# EAGLE board PCB v23 (EAGLE 9.7.0)
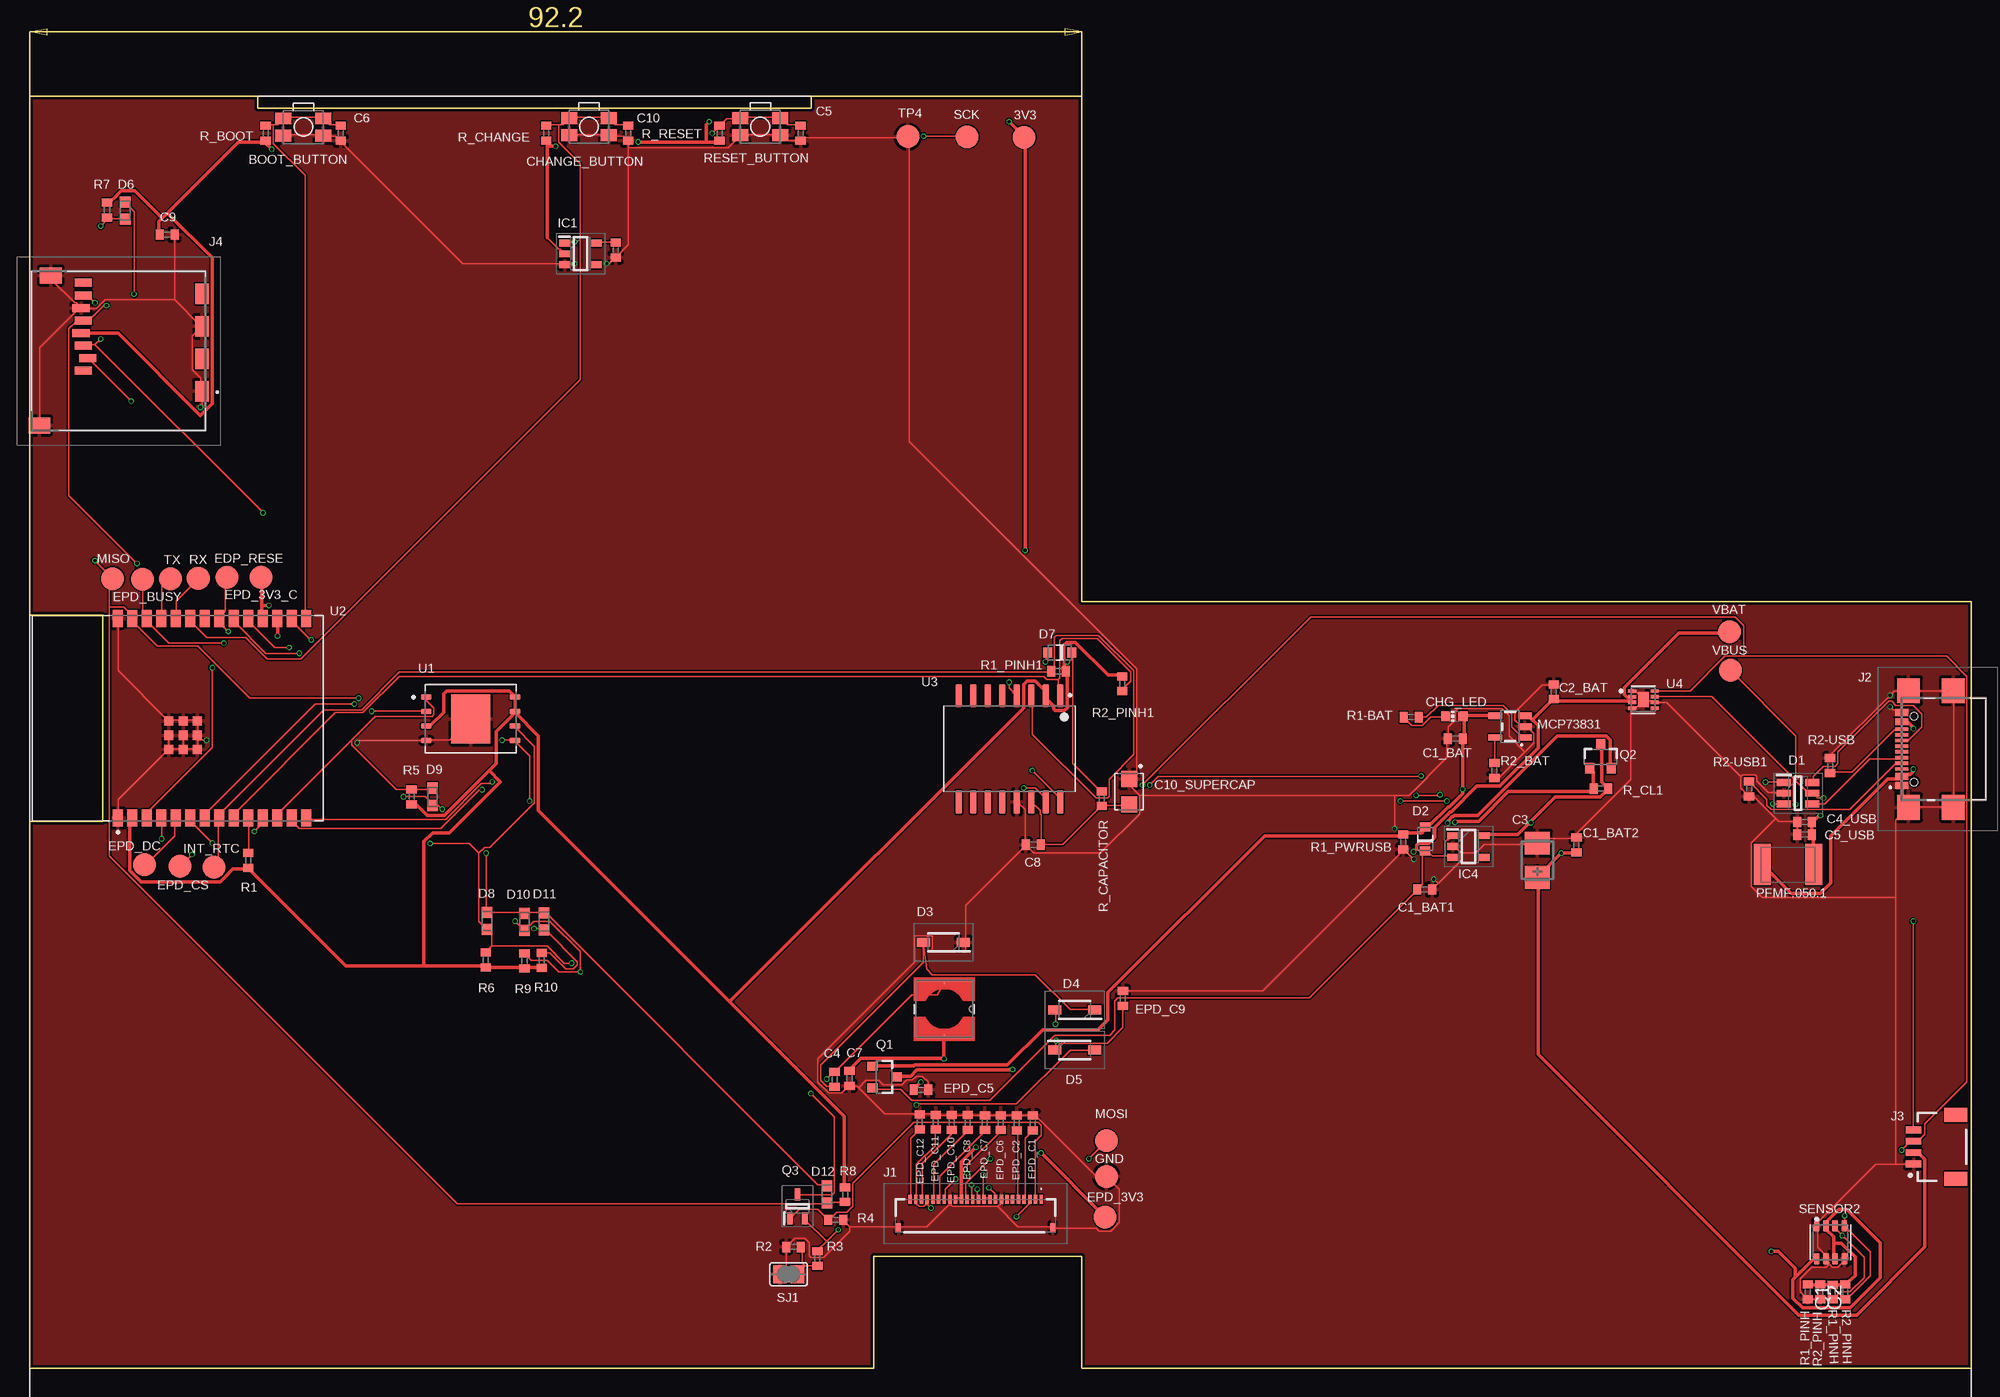
[diagram p0: board, top side]
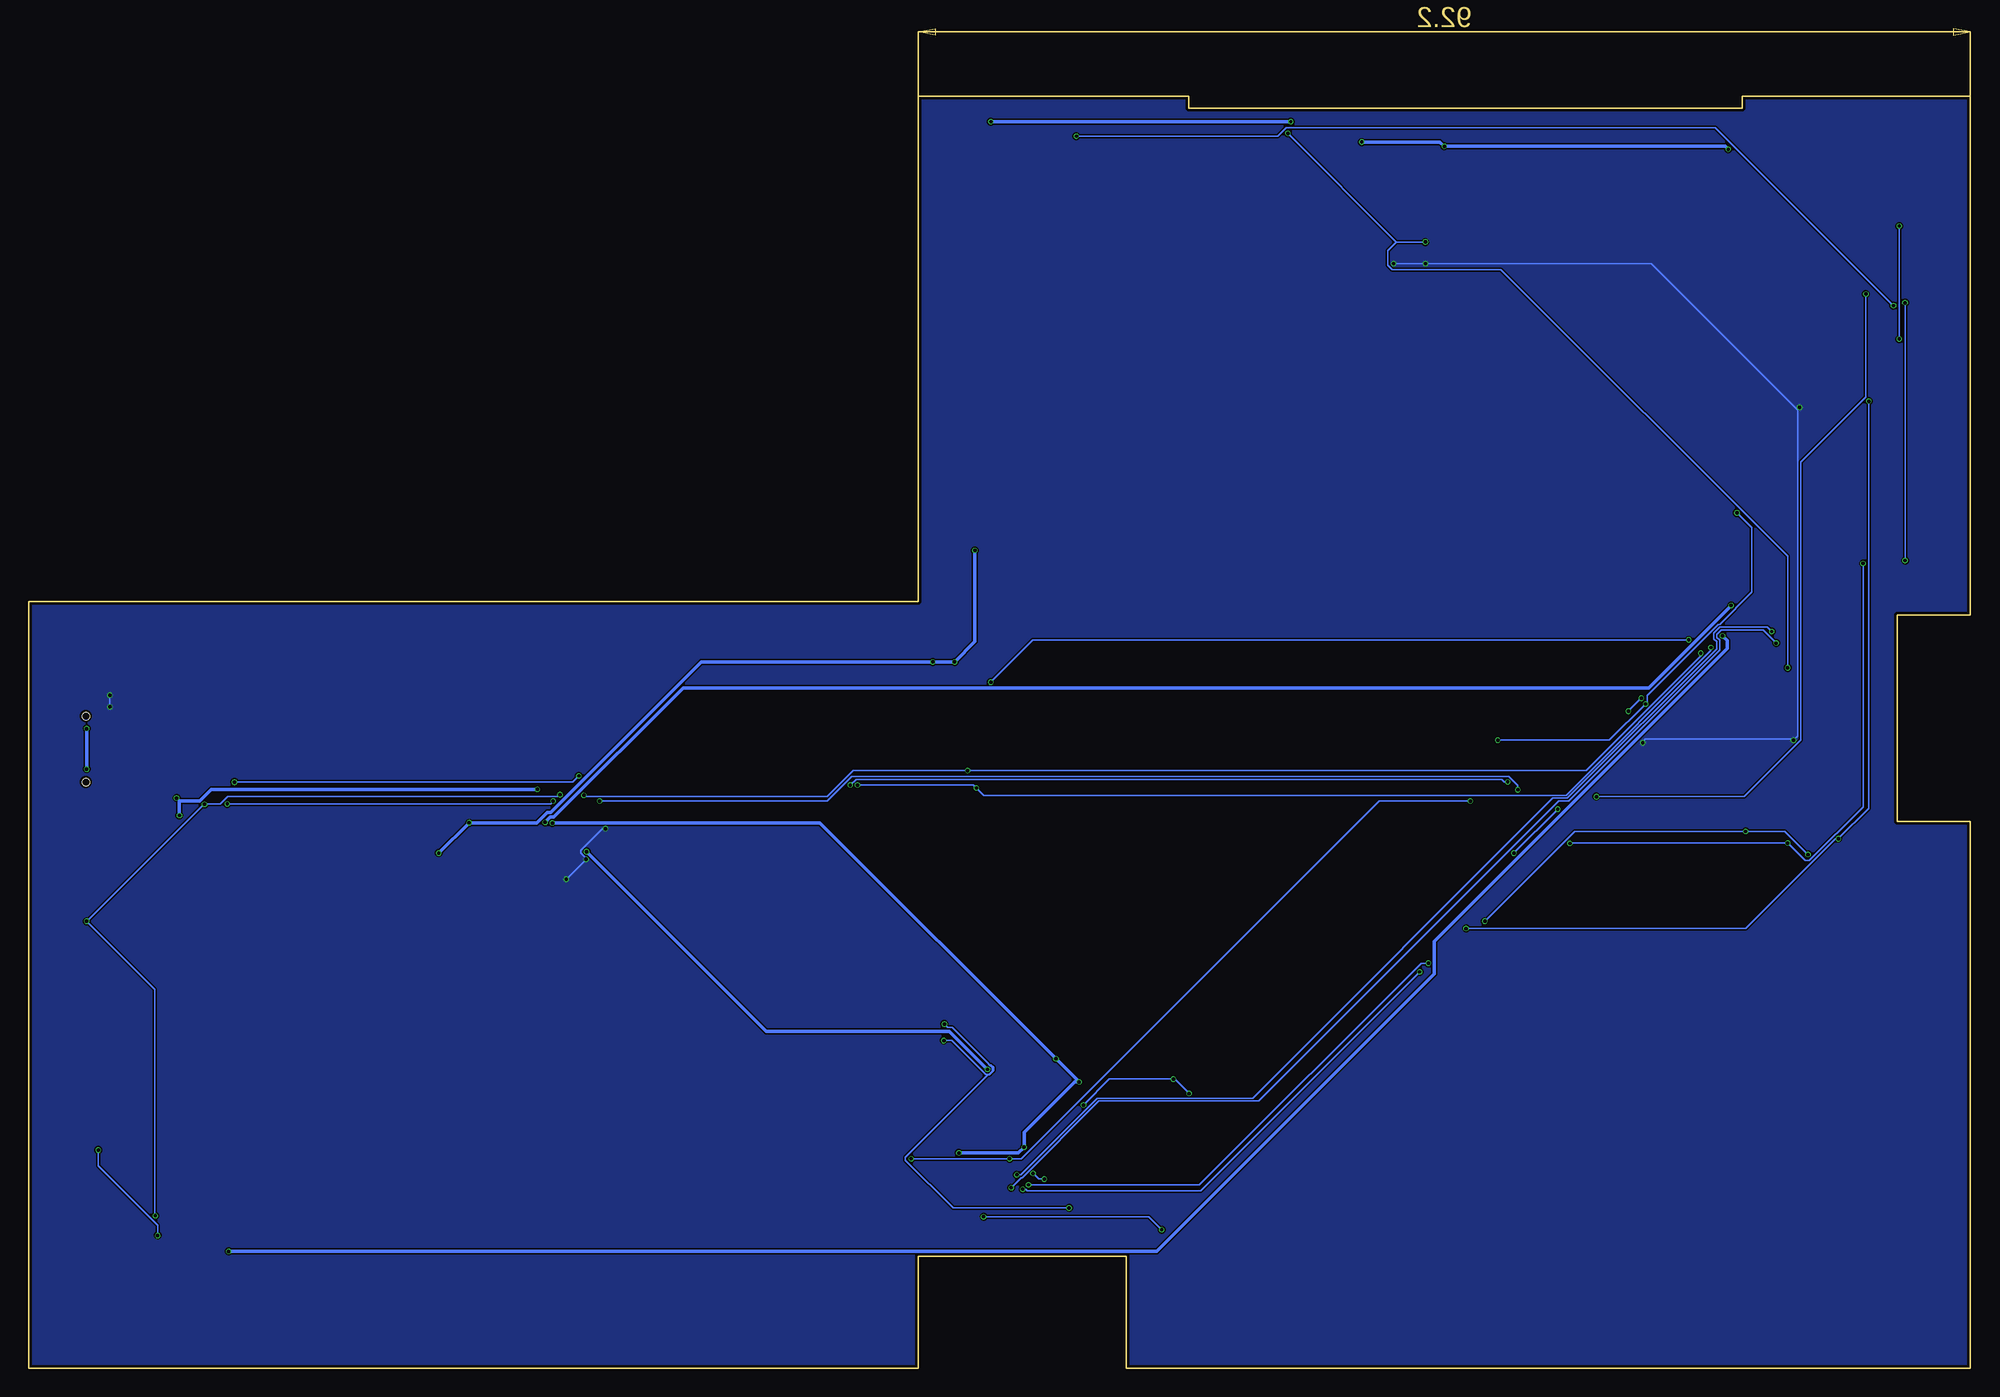
[diagram p1: board, bottom side, seen from below]

Size 170.2 x 111.52 mm. Coordinates in mm from the lower left corner, seen from the top.
Outline: 0,111.52 20,111.52 20,110.46 68.5,110.46 68.5,111.52 92.2,111.52 92.2,67.2 170.2,67.2 170.2,0 92.2,0 92.2,9.82 74,9.82 74,0 0,0 0,47.92 6.4,47.92 6.4,66.02 0,66.02 0,111.52
Copper layers (1*16): Top 0.035mm / dielectric 1.6mm / Bottom 0.035mm
Design rules "jlcpcb-2layers.dru *": minimum track width 5mil, minimum drill 0.3mm, track to track 5mil, track to pad 5mil, pad to pad 5mil, via to via 5mil, smd to smd 5mil, copper to edge 0.2mm, drill to drill 6mil, minimum pad ring 10mil, minimum via ring 3mil, stop-mask expansion 4mil, vias tented up to drill 0mil, thermal gap 10mil

## Footprints (pad centres in the part's own frame; a part is rotated, then mirrored left to right if it is on the bottom)
TP20R = smd 2 x 2: TP 0,0
MYBUTTON = smd 1.4 x 1.05: 1 1.75,0.75; 2 -1.75,0.75; 3 -1.75,-0.75; 4 1.75,-0.75
ESP32_WROVER_EAGLE-LTSPICE_C0402 = smd 0.7 x 0.9: 1 -0.65,0; 2 0.65,0
RCL_CT3528 = smd 2 x 2.2: + -1.5,0; - 1.5,0
CAPCP3225X100N = smd 1.4 x 1.4: 1 -1.1,0; 2 1.1,0
ADAFRUIT_CHIP-LED0603 = smd 0.8 x 0.8: A 0,-0.75; C 0,0.75
SOT95P280X145-6N = smd 1.2 x 0.6: 1 -1.25,0.95; 2 -1.25,0; 3 -1.25,-0.95; 4 1.25,-0.95; 5 1.25,0; 6 1.25,0.95
ESP32_WROVER_AVX---SD0805S020S1R0_AVX_SD0805S020S1R0_0 = smd 0.8 x 0.9: 1 -1.05,0; 2 1.05,0
SOD3716X135N = smd 1.15 x 0.8: 1 -1.75,0; 2 1.75,0
DIOC1608X36N = smd 0.97 x 0.94: 1 -0.75,0; 2 0.75,0
SOT95P280X120-5N = smd 0.9 x 0.6: 1 -1.4,0.95; 2 -1.4,0; 3 -1.4,-0.95; 4 1.4,-0.95; 5 1.4,0.95
FH34SRJ24S05SH99 = smd 0.3 x 0.8: 1 5.75,1.45; 2 5.25,1.45; 3 4.75,1.45; 4 4.25,1.45; 5 3.75,1.45; 6 3.25,1.45; 7 2.75,1.45; 8 2.25,1.45; 9 1.75,1.45; 10 1.25,1.45; 11 0.75,1.45; 12 0.25,1.45; 13 -0.25,1.45; 14 -0.75,1.45; 15 -1.25,1.45; 16 -1.75,1.45; 17 -2.25,1.45; 18 -2.75,1.45; 19 -3.25,1.45; 20 -3.75,1.45; 21 -4.25,1.45; 22 -4.75,1.45; 23 -5.25,1.45; 24 -5.75,1.45 | smd 0.4 x 0.8: MP1 6.75,-1.05; MP2 -6.75,-1.05
SAMACSYS_PARTS_USB4110GFA = smd 0.3 x 1.15: A1 -3.35,3.678; A4 -2.55,3.678; A5 -1.25,3.678; A6 -0.25,3.678; A7 0.25,3.678; A8 1.25,3.678; A9 2.55,3.678; A12 3.35,3.678; B1 3.05,3.678; B4 2.25,3.678; B5 1.75,3.678; B6 0.75,3.678; B7 -0.75,3.678; B8 -1.75,3.678; B9 -2.25,3.678; B12 -3.05,3.678 | smd 2.18 x 2: MP1 -5.11,-0.827; MP2 5.11,-0.827; MP3 -5.11,3.103; MP4 5.11,3.103 | hole 0.65: -2.89,2.603; 2.89,2.603
JST04_1MM_RA = smd 0.6 x 1.35: 1 -1.5,0; 2 -0.5,0; 3 0.5,0; 4 1.5,0 | smd 1.2 x 2: NC1 2.8,-3.675; NC2 -2.8,-3.675
112ATAARR03ATTEND = smd 1.8 x 1.2: G1 10.6,10.4; G2 4.9,10.4; S1 7.75,10.4; S2 2.05,10.4 | smd 1.4 x 1.9: G3 13.6,-3.85; G4 0.45,-2.85 | smd 0.7 x 1.5: P1 8.8,0; P2 7.7,0.4; P3 6.6,0; P4 5.5,-0.2; P5 4.4,0; P6 3.3,-0.2; P7 2.2,0; P8 1.1,0
IND_4828-WE-TPC_WRE = smd 0.127 x 0.127: 1 -2.286,0; 2 2.286,0
ESP32_WROVER_SPARKFUN-IC-POWER_SOT23-5 = smd 0.55 x 1.2: 1 -0.95,-1.3; 2 0,-1.3; 3 0.95,-1.3; 4 0.95,1.3; 5 -0.95,1.3
ESP32C6_VARISTOR_CT/CN1812 = smd 1.5 x 3.6: 1 -2.25,0; 2 2.25,0
ESP32_WROVER_SPARKFUN-DISCRETESEMI_SOT23-3 = smd 0.8 x 0.9: 1 -0.95,-1; 2 0.95,-1; 3 0,1.1
SOT65P210X110-3N = smd 1.05 x 0.5: 1 -1.05,0.65; 2 -1.05,-0.65; 3 1.05,0
ESP32_WROVER_EAGLE-LTSPICE_R0402 = smd 0.7 x 0.9: 1 -0.65,0; 2 0.65,0
ESP32_WROVER_BME680_PSON80P300X300X100-8N = smd 1.016 x 0.5: 1 1.458,1.2; 2 1.458,0.4; 3 1.458,-0.4; 4 1.458,-1.2; 5 -1.458,-1.22; 6 -1.458,-0.4; 7 -1.458,0.4; 8 -1.458,1.2
SJ = smd 1.168 x 1.6: 1 -0.762,0; 2 0.762,0
SON127P600X800X80-9N = smd 0.94 x 0.44: 1 -3.895,1.905; 2 -3.895,0.635; 3 -3.895,-0.635; 4 -3.895,-1.905; 5 3.895,-1.905; 6 3.895,-0.635; 7 3.895,0.635; 8 3.895,1.905 | smd 3.4 x 4.3: 9 0,0
XCVR_ESP32-C6-WROOM-1-N8 = smd 1.5 x 0.9: 1 -8.75,5.26; 2 -8.75,3.99; 3 -8.75,2.72; 4 -8.75,1.45; 5 -8.75,0.18; 6 -8.75,-1.09; 7 -8.75,-2.36; 8 -8.75,-3.63; 9 -8.75,-4.9; 10 -8.75,-6.17; 11 -8.75,-7.44; 12 -8.75,-8.71; 13 -8.75,-9.98; 14 -8.75,-11.25; 15 8.75,-11.25; 16 8.75,-9.98; 17 8.75,-8.71; 18 8.75,-7.44; 19 8.75,-6.17; 20 8.75,-4.9; 21 8.75,-3.63; 22 8.75,-2.36; 23 8.75,-1.09; 24 8.75,0.18; 25 8.75,1.45; 26 8.75,2.72; 27 8.75,3.99; 28 8.75,5.26 | smd 0.8 x 0.8: 29_1 -2.755,0.79; 29_2 -1.505,0.79; 29_3 -0.255,0.79; 29_4 -2.755,-0.46; 29_5 -1.505,-0.46; 29_6 -0.255,-0.46; 29_7 -2.755,-1.71; 29_8 -1.505,-1.71; 29_9 -0.255,-1.71
SOIC127P1032X265-16N = smd 2.05 x 0.59: 1 -4.655,4.445; 2 -4.655,3.175; 3 -4.655,1.905; 4 -4.655,0.635; 5 -4.655,-0.635; 6 -4.655,-1.905; 7 -4.655,-3.175; 8 -4.655,-4.445; 9 4.655,-4.445; 10 4.655,-3.175; 11 4.655,-1.905; 12 4.655,-0.635; 13 4.655,0.635; 14 4.655,1.905; 15 4.655,3.175; 16 4.655,4.445
SON50P200X200X80-9N = smd 0.76 x 0.27: 1 -0.985,0.75; 2 -0.985,0.25; 3 -0.985,-0.25; 4 -0.985,-0.75; 5 0.985,-0.75; 6 0.985,-0.25; 7 0.985,0.25; 8 0.985,0.75 | smd 0.9 x 1.3: 9 0,0

## Placement (x,y rotation side)
3V3  TPTP20R  [TP20R]  87.17,107.92 0 top
BOOT_BUTTON  BUTTON_CUSYOMV1  [MYBUTTON]  23.99,108.82 180 top
C1  100nF  [ESP32_WROVER_EAGLE-LTSPICE_C0402]  155.84,6.68 270 top
C1_BAT  4.7uF  [ESP32_WROVER_EAGLE-LTSPICE_C0402]  124.96,55.19 180 top
C1_BAT1  4.7uF  [ESP32_WROVER_EAGLE-LTSPICE_C0402]  122.27,41.96 0 top
C1_BAT2  4.7uF  [ESP32_WROVER_EAGLE-LTSPICE_C0402]  135.57,45.87 90 top
C2  100nF  [ESP32_WROVER_EAGLE-LTSPICE_C0402]  156.94,6.69 270 top
C2_BAT  4.7UF  [ESP32_WROVER_EAGLE-LTSPICE_C0402]  133.58,59.3 90 top
C3  100uF  [RCL_CT3528]  132.15,44.53 90 top
C4  4.7uF/25V  [ESP32_WROVER_EAGLE-LTSPICE_C0402]  70.55,25.31 90 top
C4_USB  100nF  [ESP32_WROVER_EAGLE-LTSPICE_C0402]  155.57,47.89 180 top
C5  1uF  [ESP32_WROVER_EAGLE-LTSPICE_C0402]  67.57,108.27 270 top
C5_USB  4.7uF  [ESP32_WROVER_EAGLE-LTSPICE_C0402]  155.57,46.78 180 top
C6  100nF  [ESP32_WROVER_EAGLE-LTSPICE_C0402]  27.27,108.27 270 top
C7  10uF  [ESP32_WROVER_EAGLE-LTSPICE_C0402]  71.85,25.4 270 top
C8  100nF  [ESP32_WROVER_EAGLE-LTSPICE_C0402]  87.97,45.89 180 top
C9  100nF  [ESP32_WROVER_EAGLE-LTSPICE_C0402]  12.05,99.38 0 top
C10  100nF  [ESP32_WROVER_EAGLE-LTSPICE_C0402]  52.47,108.27 270 top
C10_SUPERCAP  CPH3225A  [CAPCP3225X100N]  96.37,50.54 270 top
C_DELAY  100nF  [ESP32_WROVER_EAGLE-LTSPICE_C0402]  51.37,98.02 270 top
CHANGE_BUTTON  BUTTON_CUSYOMV1  [MYBUTTON]  49.02,108.85 180 top
CHG_LED  [ADAFRUIT_CHIP-LED0603]  124.88,57.16 90 top
D1  USBLC6-2SC6Y  [SOT95P280X145-6N]  155,50.41 0 top
D2  ESP32_WROVER_AVX---SD0805S020S1R0_AVX_SD0805S020S1R0_0_0AVX_SD0805S020S1R0_0_0  [ESP32_WROVER_AVX---SD0805S020S1R0_AVX_SD0805S020S1R0_0]  122.31,46.39 90 top
D3  MBR0530  [SOD3716X135N]  80.09,37.32 180 top
D4  MBR0530  [SOD3716X135N]  91.59,31.41 180 top
D5  MBR0530  [SOD3716X135N]  91.59,27.89 0 top
D6  PGB1010603MR  [DIOC1608X36N]  8.37,101.48 90 top
D7  ESP32_WROVER_AVX---SD0805S020S1R0_AVX_SD0805S020S1R0_0_0AVX_SD0805S020S1R0_0_0  [ESP32_WROVER_AVX---SD0805S020S1R0_AVX_SD0805S020S1R0_0]  90.27,62.74 180 top
D8  PGB1010603MR  [DIOC1608X36N]  40.07,39.2 90 top
D9  PGB1010603MR  [DIOC1608X36N]  35.31,50.09 270 top
D10  PGB1010603MR  [DIOC1608X36N]  43.37,39.12 90 top
D11  PGB1010603MR  [DIOC1608X36N]  45.07,39.16 90 top
D12  PGB1010603MR  [DIOC1608X36N]  69.87,15.23 90 top
EDP_RESE  TPTP20R  [TP20R]  17.27,69.34 0 top
EPD_3V3  TPTP20R  [TP20R]  94.27,13.24 0 top
EPD_3V3_C  TPTP20R  [TP20R]  20.27,69.36 0 top
EPD_BUSY  TPTP20R  [TP20R]  9.87,69.18 0 top
EPD_C1  1uF/50V  [ESP32_WROVER_EAGLE-LTSPICE_C0402]  87.92,21.49 90 top
EPD_C2  1uF/50V  [ESP32_WROVER_EAGLE-LTSPICE_C0402]  86.52,21.5 90 top
EPD_C5  1uF/50V  [ESP32_WROVER_EAGLE-LTSPICE_C0402]  78.12,24.41 0 top
EPD_C6  1uF/50V  [ESP32_WROVER_EAGLE-LTSPICE_C0402]  85.12,21.52 90 top
EPD_C7  1uF/50V  [ESP32_WROVER_EAGLE-LTSPICE_C0402]  83.72,21.53 90 top
EPD_C8  1uF/50V  [ESP32_WROVER_EAGLE-LTSPICE_C0402]  82.22,21.54 90 top
EPD_C9  1uF/50V  [ESP32_WROVER_EAGLE-LTSPICE_C0402]  95.82,32.41 90 top
EPD_C10  1uF/50V  [ESP32_WROVER_EAGLE-LTSPICE_C0402]  80.82,21.56 90 top
EPD_C11  1uF/50V  [ESP32_WROVER_EAGLE-LTSPICE_C0402]  79.42,21.57 90 top
EPD_C12  1uF/50V  [ESP32_WROVER_EAGLE-LTSPICE_C0402]  78.02,21.58 90 top
EPD_CS  TPTP20R  [TP20R]  13.17,44 0 top
EPD_DC  TPTP20R  [TP20R]  10.07,44.12 0 top
GND  TPTP20R  [TP20R]  94.37,16.8 0 top
IC1  BD5229G-TR  [SOT95P280X120-5N]  48.28,97.7 0 top
IC4  XC6220A331MR-G  [SOT95P280X120-5N]  126.12,45.73 0 top
INT_RTC  TPTP20R  [TP20R]  16.17,43.9 0 top
J1  FH34SRJ-24S-0.5SH_99_  [FH34SRJ24S05SH99]  82.91,13.36 0 top
J2  SAMACSYS_PARTS_USB4110-GF-A  [SAMACSYS_PARTS_USB4110GFA]  167.78,54.28 90 top
J3  QWIIC_RIGHT_ANGLE  [JST04_1MM_RA]  165.13,19.4 90 top
J4  112A-TAAR-R03_ATTEND  [112ATAARR03ATTEND]  4.69,96.26 270 top
L1  68uH  [IND_4828-WE-TPC_WRE]  80.16,31.48 270 top
MCP73831  ESP32_WROVER_SPARKFUN-IC-POWER_MCP73831  [ESP32_WROVER_SPARKFUN-IC-POWER_SOT23-5]  129.76,56.24 90 top
MISO  TPTP20R  [TP20R]  7.27,69.22 0 top
MOSI  TPTP20R  [TP20R]  94.37,19.94 0 top
PFMF.050.1  ESP32C6_VARISTORCN1812  [ESP32C6_VARISTOR_CT/CN1812]  154.11,44.15 0 top
Q1  20V/4.2A/52mΩ/1.4W  [ESP32_WROVER_SPARKFUN-DISCRETESEMI_SOT23-3]  74.88,25.52 270 top
Q2  20V/4.2A/52mΩ/1.4W  [ESP32_WROVER_SPARKFUN-DISCRETESEMI_SOT23-3]  137.69,53.6 0 top
Q3  SI1308EDL-T1-GE3  [SOT65P210X110-3N]  67.29,14.19 90 top
R1  10k  [ESP32_WROVER_EAGLE-LTSPICE_R0402]  19.16,44.51 270 top
R1-BAT  200  [ESP32_WROVER_EAGLE-LTSPICE_R0402]  121.08,57.08 0 top
R1_PINH  10K  [ESP32_WROVER_EAGLE-LTSPICE_R0402]  158.04,6.67 90 top
R1_PINH1  10K  [ESP32_WROVER_EAGLE-LTSPICE_R0402]  90.17,61.1 0 top
R1_PWRUSB  100K  [ESP32_WROVER_EAGLE-LTSPICE_R0402]  120.4,46.12 90 top
R2  2.2  [ESP32_WROVER_EAGLE-LTSPICE_R0402]  66.95,10.62 0 top
R2-USB  5K1  [ESP32_WROVER_EAGLE-LTSPICE_R0402]  157.81,52.83 90 top
R2-USB1  5K1  [ESP32_WROVER_EAGLE-LTSPICE_R0402]  150.71,50.79 90 top
R2_BAT  2K  [ESP32_WROVER_EAGLE-LTSPICE_R0402]  128.38,52.39 90 top
R2_PINH  10K  [ESP32_WROVER_EAGLE-LTSPICE_R0402]  159.14,6.68 90 top
R2_PINH1  10K  [ESP32_WROVER_EAGLE-LTSPICE_R0402]  95.77,60.01 90 top
R3  0.47  [ESP32_WROVER_EAGLE-LTSPICE_R0402]  69.04,9.61 90 top
R4  10k  [ESP32_WROVER_EAGLE-LTSPICE_R0402]  70.64,13 180.1 top
R5  10K  [ESP32_WROVER_EAGLE-LTSPICE_R0402]  33.47,50.08 270 top
R6  10K  [ESP32_WROVER_EAGLE-LTSPICE_R0402]  39.97,35.79 270 top
R7  10K  [ESP32_WROVER_EAGLE-LTSPICE_R0402]  6.77,101.53 90 top
R8  10K  [ESP32_WROVER_EAGLE-LTSPICE_R0402]  71.47,15.22 90 top
R9  10K  [ESP32_WROVER_EAGLE-LTSPICE_R0402]  43.37,35.71 270 top
R10  10K  [ESP32_WROVER_EAGLE-LTSPICE_R0402]  44.87,35.75 270 top
R_BOOT  10K  [ESP32_WROVER_EAGLE-LTSPICE_R0402]  20.67,108.27 90 top
R_CAPACITOR  15  [ESP32_WROVER_EAGLE-LTSPICE_R0402]  93.97,49.93 270 top
R_CHANGE  10K  [ESP32_WROVER_EAGLE-LTSPICE_R0402]  45.27,108.27 90 top
R_CL1  10K  [ESP32_WROVER_EAGLE-LTSPICE_R0402]  137.72,50.81 180 top
R_RESET  10K  [ESP32_WROVER_EAGLE-LTSPICE_R0402]  60.47,108.27 90 top
RESET_BUTTON  BUTTON_CUSYOMV1  [MYBUTTON]  64.04,108.85 180 top
RX  TPTP20R  [TP20R]  14.77,69.24 0 top
SCK  TPTP20R  [TP20R]  82.17,107.96 0 top
SENSOR2  ESP32_WROVER_BME680_BME680  [ESP32_WROVER_BME680_PSON80P300X300X100-8N]  157.84,11.03 90 top
SJ1  [SJ]  66.52,8.23 0 top
TP4  TPTP20R  [TP20R]  76.97,107.98 0 top
TX  TPTP20R  [TP20R]  12.32,69.22 0 top
U1  W25Q512JVEIQ  [SON127P600X800X80-9N]  38.65,56.93 0 top
U2  ESP32-C6-WROOM-1-N8  [XCVR_ESP32-C6-WROOM-1-N8]  12.98,56.99 90 top
U3  DS3231SN#  [SOIC127P1032X265-16N]  85.88,54.3 270 top
U4  MAX17048G+T10  [SON50P200X200X80-9N]  141.44,58.62 0 top
VBAT  TPTP20R  [TP20R]  148.97,64.56 0 top
VBUS  TPTP20R  [TP20R]  149.07,61.18 0 top

## Library data of the parts
3V3 BOOT_BUTTON CHANGE_BUTTON CHG_LED EDP_RESE EPD_3V3 EPD_3V3_C EPD_BUSY EPD_CS EPD_DC GND INT_RTC MISO MOSI PFMF.050.1 RESET_BUTTON RX SCK SJ1 TP4 TX VBAT VBUS = DeskAssistant v19 v1
C1 C1_BAT C1_BAT1 C1_BAT2 C2 C2_BAT C4 C4_USB C5 C5_USB C6-C10 C_DELAY EPD_C1 EPD_C2 EPD_C5-EPD_C12 = DeskAssistant v19 v1; SPICEMODEL: NONE; SPICEPREFIX: C
C3 = DeskAssistant v19 v1; SPICEPREFIX: C
C10_SUPERCAP = DeskAssistant v19 v1; AVAILABILITY: Not in stock; CHECK_PRICES: https://www.snapeda.com/parts/CPH3225A/Seiko+Instruments/view-part/?ref=eda; DESCRIPTION: 11 mF (EDLC) Supercapacitor 3.3 V 1210 (3225 Metric) - -; MF: Seiko Instruments; MP: CPH3225A; PACKAGE: 1210 Seiko; PRICE: None; PURCHASE-URL: https://www.snapeda.com/api/url_track_click_mouser/?unipart_id=562593&manufacturer=Seiko Instruments&part_name=CPH3225A&search_term=None; SNAPEDA_LINK: https://www.snapeda.com/parts/CPH3225A/Seiko+Instruments/view-part/?ref=snap
D1 = DeskAssistant v19 v1; AVAILABILITY: In Stock; CHECK_PRICES: https://www.snapeda.com/parts/USBLC6-2SC6Y/STMicroelectronics/view-part/?ref=eda; DESCRIPTION: 17V Clamp 5A (8/20µs) Ipp Tvs Diode Surface Mount SOT-23-6; MF: STMicroelectronics; MP: USBLC6-2SC6Y; PACKAGE: SOT-23-6 STMicroelectronics; PRICE: None; SNAPEDA_LINK: https://www.snapeda.com/parts/USBLC6-2SC6Y/STMicroelectronics/view-part/?ref=snap
D2 D7 = DeskAssistant v19 v1; CENTROID_NOT_SPECIFIED: No; DATASHEET: http://datasheets.avx.com/schottky.pdf; DIGIKEY_DESCRIPTION: DIODE SCHOTTKY 20V 1A 0805; DIGIKEY_PART_NUMBER: 478-7800-1-ND; LEAD_FREE: yes; MF: AVX; MOUSER_PART_NUMBER: 581-SD0805S020S1R0; PACKAGE: 0805 (2012 metric); PREFIX: D; ROHS: yes; TEMPERATURE_RANGE_HIGH: +125°C; TEMPERATURE_RANGE_LOW: -55°C
D3-D5 = DeskAssistant v19 v1; AVAILABILITY: In Stock; CHECK_PRICES: https://www.snapeda.com/parts/MBR0530/Onsemi/view-part/?ref=eda; DESCRIPTION: Diode Schottky 30 V 500mA Surface Mount SOD-123; MF: ON Semiconductor; MP: MBR0530; PACKAGE: SOD-123-2 ON Semiconductor; PRICE: None; PURCHASE-URL: https://www.snapeda.com/api/url_track_click_mouser/?unipart_id=179458&manufacturer=ON Semiconductor&part_name=MBR0530&search_term=None; SNAPEDA_LINK: https://www.snapeda.com/parts/MBR0530/Onsemi/view-part/?ref=snap
D6 D8-D12 = DeskAssistant v19 v1; AVAILABILITY: In Stock; CHECK_PRICES: https://www.snapeda.com/parts/PGB1010603MR/Littelfuse/view-part/?ref=eda; DESCRIPTION: 150V (Typ) Clamp - Ipp Tvs Diode Surface Mount 0603 (1608 Metric); MF: Littelfuse Inc.; MP: PGB1010603MR; PACKAGE: 0603 Littelfuse Inc.; PRICE: None; PURCHASE-URL: https://www.snapeda.com/api/url_track_click_mouser/?unipart_id=5659453&manufacturer=Littelfuse Inc.&part_name=PGB1010603MR&search_term=None; SNAPEDA_LINK: https://www.snapeda.com/parts/PGB1010603MR/Littelfuse/view-part/?ref=snap
IC1 = DeskAssistant v19 v1; DESCRIPTION: Voltage Detector with Adjustable Delay Time: CMOS processes are utilized to develop high precision, low current consumption CMOS reset ICs that allow arbitrary setting of the delay time. The extensive lineup includes both Nch Open Drain and CMOS output types in a wide range of detection voltages (from 2.3V to 6.0V, in 0.1V steps), enabling selection of the ideal solution based on customer requirements. In addition, the entire series is of course both lead-free and RoHS-compliant.; HEIGHT: 1.25mm; MANUFACTURER_NAME: ROHM Semiconductor; MANUFACTURER_PART_NUMBER: BD5229G-TR; MOUSER_PART_NUMBER: 755-BD5229G-TR; MOUSER_PRICE-STOCK: https://www.mouser.co.uk/ProductDetail/ROHM-Semiconductor/BD5229G-TR?qs=4kLU8WoGk0vvnhrrYwdszw%3D%3D
IC4 = DeskAssistant v19 v1; DESCRIPTION: LDO Voltage Regulators; HEIGHT: 1.2mm; MANUFACTURER_NAME: Torex; MANUFACTURER_PART_NUMBER: XC6220A331MR-G; MOUSER_PART_NUMBER: 865-XC6220A331MR-G; MOUSER_PRICE-STOCK: https://www.mouser.co.uk/ProductDetail/Torex-Semiconductor/XC6220A331MR-G?qs=AsjdqWjXhJ8ZSWznL1J0gg%3D%3D
J1 = DeskAssistant v19 v1; DESCRIPTION: 24 Position FFC, FPC Connector Contacts, Top and Bottom 0.020" (0.50mm) Surface Mount, Right Angle; HEIGHT: 1.1mm; MANUFACTURER_NAME: Hirose; MANUFACTURER_PART_NUMBER: FH34SRJ-24S-0.5SH(99); MOUSER_PART_NUMBER: 798-FH34SRJ24S05SH99; MOUSER_PRICE-STOCK: https://www.mouser.co.uk/ProductDetail/Hirose-Connector/FH34SRJ-24S-0.5SH99?qs=vcbW%252B4%252BSTIpKBl5ap9J8Fw%3D%3D
J2 = DeskAssistant v19 v1; DESCRIPTION: CONN USB 2.0 TYPE-C R/A SMT; HEIGHT: 3.26mm; MANUFACTURER_NAME: GCT (GLOBAL CONNECTOR TECHNOLOGY); MANUFACTURER_PART_NUMBER: USB4110-GF-A; MOUSER_PART_NUMBER: 640-USB4110-GF-A; MOUSER_PRICE-STOCK: https://www.mouser.co.uk/ProductDetail/GCT/USB4110-GF-A?qs=KUoIvG%2F9IlYiZvIXQjyJeA%3D%3D
J3 = DeskAssistant v19 v1; PROD_ID: CONN-13694
J4 = DeskAssistant v19 v1; DESCRIPTION: Micro SD Card Socket, Push-Push Type, Top Mount, SMT, H=1.83mm, 10u; HEIGHT: 1.9mm; MANUFACTURER_NAME: ATTEND; MANUFACTURER_PART_NUMBER: 112A-TAAR-R03 ATTEND
L1 = DeskAssistant v19 v1; COPYRIGHT: Copyright (C) 2024 Ultra Librarian. All rights reserved.; MANUFACTURER_PART_NUMBER: 744043680; MFR_NAME: Wurth Electronics
MCP73831 = DeskAssistant v19 v1; PROD_ID: IC-09995
Q1 Q2 = DeskAssistant v19 v1; PROD_ID: TRAN-14388
Q3 = DeskAssistant v19 v1; AVAILABILITY: In Stock; CHECK_PRICES: https://www.snapeda.com/parts/SI1308EDL-T1-GE3/Vishay+Siliconix/view-part/?ref=eda; DESCRIPTION: Si1308EDL-T1-GE3 N-channel MOSFET Transistor, 1.5 A, 30 V, 3-Pin SC-70 | Siliconix / Vishay SI1308EDL-T1-GE3; MF: Vishay Siliconix; MP: SI1308EDL-T1-GE3; PACKAGE: SOT-323 Vishay Semiconductor; PRICE: None; PURCHASE-URL: https://www.snapeda.com/api/url_track_click_mouser/?unipart_id=274603&manufacturer=Vishay Siliconix&part_name=SI1308EDL-T1-GE3&search_term=None; SNAPEDA_LINK: https://www.snapeda.com/parts/SI1308EDL-T1-GE3/Vishay+Siliconix/view-part/?ref=snap
R1 R1-BAT R1_PINH R1_PINH1 R1_PWRUSB R2 R2-USB R2-USB1 R2_BAT R2_PINH R2_PINH1 R3-R10 R_BOOT R_CAPACITOR R_CHANGE R_CL1 R_RESET = DeskAssistant v19 v1; SPICEMODEL: NONE; SPICEPREFIX: R
SENSOR2 = DeskAssistant v19 v1; AVAILABILITY: Unavailable; DESCRIPTION: Integrated Environmental Unit; MF: Bosch Sensortec; MP: BME680; PACKAGE: LGA-8 Bosch Tools; PRICE: None
U1 = DeskAssistant v19 v1; AVAILABILITY: In Stock; CHECK_PRICES: https://www.snapeda.com/parts/W25Q512JVEIQ/Winbond+Electronics/view-part/?ref=eda; DESCRIPTION: FLASH - NOR Memory IC 512Mb (64M x 8) SPI - Quad I/O 133 MHz 8-WSON (8x6); MF: Winbond Electronics; MP: W25Q512JVEIQ; PACKAGE: Package; PRICE: None; SNAPEDA_LINK: https://www.snapeda.com/parts/W25Q512JVEIQ/Winbond+Electronics/view-part/?ref=snap
U2 = DeskAssistant v19 v1; AVAILABILITY: In Stock; CHECK_PRICES: https://www.snapeda.com/parts/ESP32-C6-WROOM-1-N8/Espressif+Systems/view-part/?ref=eda; DESCRIPTION: Multiprotocol Modules ESP32-C6 module, Wi-Fi 6 in 2.4 GHz band, Bluetooth 5, Zigbee 3.0 and Thread. ESP34-WROOM Compatible - ENGINEERING SAMPLE; MF: Espressif Systems; MP: ESP32-C6-WROOM-1-N8; PACKAGE: None; PRICE: None; SNAPEDA_LINK: https://www.snapeda.com/parts/ESP32-C6-WROOM-1-N8/Espressif+Systems/view-part/?ref=snap
U3 = DeskAssistant v19 v1; AVAILABILITY: In Stock; CHECK_PRICES: https://www.snapeda.com/parts/DS3231SN%23/Analog+Devices/view-part/?ref=eda; DESCRIPTION: Extremely Accurate I²C-Integrated RTC/TCXO/Crystal; MF: Analog Devices; MP: DS3231SN#; PACKAGE: SOIC-16 Maxim; PRICE: None; PURCHASE-URL: https://www.snapeda.com/api/url_track_click_mouser/?unipart_id=99048&manufacturer=Analog Devices&part_name=DS3231SN#&search_term=None; SNAPEDA_LINK: https://www.snapeda.com/parts/DS3231SN%23/Analog+Devices/view-part/?ref=snap
U4 = DeskAssistant v19 v1; AVAILABILITY: In Stock; CHECK_PRICES: https://www.snapeda.com/parts/MAX17048G+T10/Analog+Devices/view-part/?ref=eda; DESCRIPTION: 3µA 1-Cell/2-Cell Fuel Gauge with ModelGauge; MF: Analog Devices; MP: MAX17048G+T10; PACKAGE: TDFN-8 Maxim; PRICE: None; PURCHASE-URL: https://www.snapeda.com/api/url_track_click_mouser/?unipart_id=329239&manufacturer=Analog Devices&part_name=MAX17048G+T10&search_term=None; SNAPEDA_LINK: https://www.snapeda.com/parts/MAX17048G+T10/Analog+Devices/view-part/?ref=snap

## Nets
3V3: 3V3.TP C1_BAT2.1 C3.+ C9.1 D7.2 IC1.2 IC4.5 J3.2 J4.P4 Q2.3 R1.2 R1_PINH1.2 R2_PINH1.2 R5.2 R6.2 R7.2 R8.2 R9.2 R10.2 R_BOOT.1 R_CHANGE.1 R_CL1.1 R_RESET.1 U1.3 U1.7 U1.8 U2.2 U3.2
32KHZ: R2_PINH1.1 U2.9 U3.1
DN: D1.4 J2.B7
DP: D1.6 J2.B6
EPD_3V3: C7.1 EPD_3V3.TP EPD_C5.1 J1.15 J1.16 L1.2 Q2.2
EPD_3V3_C: EPD_3V3_C.TP Q2.1 R_CL1.2 U2.18
EPD_BUSY: EPD_BUSY.TP J1.9 U2.26
EPD_CS: D10.1 EPD_CS.TP J1.12 R9.1 U2.11
EPD_DC: EPD_DC.TP U2.5
EPD_RST: EDP_RESE.TP J1.10 J1.11 U2.21
FLASH_CS: D9.1 R5.1 U1.1 U2.12
GDR: J1.2 Q3.1 R4.2
GND: BOOT_BUTTON.1 BOOT_BUTTON.2 C1.2 C1_BAT1.2 C1_BAT2.2 C1_BAT.2 C2.2 C2_BAT.2 C3.- C4_USB.2 C5.2 C5_USB.2 C6.2 C7.2 C8.2 C9.2 C10.2 C10_SUPERCAP.1 C_DELAY.2 CHANGE_BUTTON.1 CHANGE_BUTTON.2 D1.2 D3.1 EPD_C1.2 EPD_C2.2 EPD_C5.2 EPD_C6.2 EPD_C7.2 EPD_C8.2 EPD_C9.2 EPD_C10.2 EPD_C11.2 EPD_C12.2 GND.TP IC1.3 IC4.2 J1.8 J1.17 J1.MP1 J1.MP2 J2.A1 J2.A12 J2.B1 J2.B12 J2.MP1 J2.MP2 J2.MP3 J2.MP4 J3.1 J4.G1 J4.G2 J4.G3 J4.G4 J4.P6 MCP73831.2 R1_PWRUSB.1 R2-USB1.1 R2-USB.2 R2.1 R2_BAT.1 R4.1 RESET_BUTTON.1 RESET_BUTTON.2 SENSOR2.1 SENSOR2.5 SENSOR2.7 SJ1.1 TP4.TP U1.4 U1.9 U2.1 U2.28 U2.29_1 U2.29_2 U2.29_3 U2.29_4 U2.29_5 U2.29_6 U2.29_7 U2.29_8 U2.29_9 U3.13 U4.1 U4.4 U4.6 U4.9
GPIO8: R1.1 U2.10
I2C_PW: C1.1 C2.1 R1_PINH.2 R2_PINH.2 SENSOR2.2 SENSOR2.6 SENSOR2.8 U2.17
INT_RTC: INT_RTC.TP R1_PINH1.1 U2.8 U3.3
IO/BOOT: BOOT_BUTTON.3 BOOT_BUTTON.4 C6.1 R_BOOT.2 U2.15
IO/CHANGE: C10.1 CHANGE_BUTTON.3 CHANGE_BUTTON.4 R_CHANGE.2 U2.23
MISO: D12.1 J4.P7 MISO.TP R8.1 U1.2 U2.27
MOSI: D6.1 J1.14 J4.P3 MOSI.TP R7.1 U1.5 U2.7
N$3: C1_BAT1.1 D2.1 IC4.1 IC4.3 Q1.2
N$4: C4.1 D3.2 D4.1
N$5: J2.B5 R2-USB.1
N$6: J2.A5 R2-USB1.2
N$9: CHG_LED.C R1-BAT.1
N$10: MCP73831.1 R1-BAT.2
N$11: EPD_C12.1 J1.24
N$12: MCP73831.5 R2_BAT.2
N$13: C_DELAY.1 IC1.5
N$14: D7.1 R_CAPACITOR.1
N$15: EPD_C10.1 J1.22
N$17: EPD_C8.1 J1.20
N$18: EPD_C7.1 J1.19
N$19: EPD_C6.1 J1.18
N$21: EPD_C2.1 J1.5
N$22: EPD_C1.1 J1.4
N$23: D6.2 D8.2 D9.2 D10.2 D11.2 D12.2
PREVGL: D4.2 D5.1 EPD_C9.1 EPD_C11.1 J1.21 J1.23
RESE: J1.3 Q3.2 R3.2
RESE': R2.2 R3.1 SJ1.2
RESET: C5.1 IC1.1 R_RESET.2 RESET_BUTTON.3 RESET_BUTTON.4 U2.3
RTC_RST: U2.16 U3.4
RX: RX.TP U2.24
SCK: D8.1 J1.13 J4.P5 R6.1 SCK.TP U1.6 U2.6
SCL: J3.4 R2_PINH.1 SENSOR2.4 U2.20 U3.16 U4.7
SDA: J3.3 R1_PINH.1 SENSOR2.3 U2.19 U3.15 U4.8
SRC: C4.2 D5.2 L1.1 Q3.3
SS_SD: D11.1 J4.P2 R10.1 U2.4
TX: TX.TP U2.25
USB_D+: D1.1 U2.14
USB_D-: D1.3 U2.13
VBAT: C2_BAT.1 MCP73831.3 Q1.3 U4.2 U4.3 VBAT.TP
VBUS: C1_BAT.1 C4_USB.1 C5_USB.1 CHG_LED.A D1.5 D2.2 MCP73831.4 PFMF.050.1.2 Q1.1 R1_PWRUSB.2 VBUS.TP
VRTC: C8.1 C10_SUPERCAP.2 R_CAPACITOR.2 U3.14
VUSB: J2.A4 J2.A9 J2.B4 J2.B9 PFMF.050.1.1

## Tracks (layer width: path | path; a pad name or v marks a point on that pad's centre or on a via)
3V3  (via drill 0.3)
  Top 0.127: 127.64,46.8 IC4.5 | 138.3,50.74 R_CL1.1 138.3,50.87 | 137.79,54.68 Q2.3 | 135.51,45.15 C1_BAT2.1 | 132.21,43.12 C3.+ 132.21,42.99 | 165.48,18.86 165.23,18.86 J3.2 | v131.57,47.82 131.57,47.95 | 45.34,99.13 46.35,98.11 46.48,98.11 46.86,97.73 IC1.2 | 45.34,107.13 45.34,107.51 R_CHANGE.1 | 60.45,107.51 R_RESET.1 | 7.11,102.3 6.86,102.3 R7.2 | 11.3,99.38 C9.1 | 4.57,90.74 J4.P4 | 20.57,107.51 R_BOOT.1 | 90.93,61.03 R1_PINH1.2 90.81,61.15 90.68,61.28 | 95.76,60.77 R2_PINH1.2 | 90.68,61.91 90.73,61.91 | 89.15,62.68 D7.2 | 87.25,107.89 3V3.TP 87.12,108.02 | 43.43,35.12 R9.2 43.31,35.12 | 44.83,35.12 R10.2 | 40.01,35.12 R6.2 39.88,35.24 | 8.76,48.07 8.89,48.2 U2.2 | 19.05,43.75 R1.2 19.18,43.75 | 35.12,56.33 34.8,56.33 U1.3 | U1.8 42.55,58.87 | 71.37,15.94 R8.2 | 33.53,49.34 R5.2 | 42.55,57.47 U1.7 | 89.03,58.99 U3.2 88.95,58.85 | v59.56,109.29 59.31,109.03
  Top 0.3: 127.64,46.8 130.43,46.8 131.57,47.95 133.71,50.08 137.65,50.08 138.3,50.74 | 137.79,54.68 137.79,51.37 138.3,50.87 | 135.51,45.15 v134.24,45.15 132.21,43.12 | 14.96,83.53 16,84.57 16,97.35 | 95.76,60.77 94.53,60.77 91.66,63.64 90.9,63.64 90.64,63.38 90.64,62.17 90.81,62.01 90.83,62.01 v90.93,61.91 | 90.68,61.28 90.68,61.91 | 89.15,62.68 89.15,62.04 v89.03,61.91 | 90.73,61.91 v90.93,61.91 | v90.93,61.91 | 44.83,35.12 43.43,35.12 | 43.31,35.12 40.01,35.12 | 34.54,35.24 39.88,35.24 | 35.12,56.33 36.3,57.51 36.3,59.12 36.56,59.38 42.04,59.38 42.55,58.87 | 71.37,15.94 71.37,22.09 61.37,32.1 | 61.37,32.1 44.58,48.89 44.58,55.44 42.55,57.47 40.89,55.82 40.89,53.02 40.26,52.39 | 33.53,49.34 33.96,49.34 34.85,48.45 36.32,48.45 40.26,52.39 | U1.7 U1.8 | 35.31,46.93 36.78,46.93 41.25,51.4 40.26,52.39 | 89.03,58.99 89.03,59.38 88.14,60.26 87.42,60.26 87.12,59.96 87.12,57.89 61.42,32.19 61.42,32.15 61.37,32.1 | 90.93,61.03 90.93,57.89 90.68,57.64 89.89,57.64 89.74,57.79 89.74,58.07 88.95,58.85 | 165.48,18.86 165.54,18.86 166.12,18.28 166.12,10.63 160.12,4.64 155.06,4.64 132.21,27.49 132.21,42.99
  Top 0.305: 45.34,99.13 45.34,107.13 v46.1,107.13 | v53.34,107.51 59.31,107.51 | 59.31,107.51 60.45,107.51 | 11.6,100.82 9.19,103.24 8.03,103.24 7.62,102.83 7.62,102.81 7.11,102.3 | 11.3,99.38 11.3,100.52 11.6,100.82 | 11.6,100.82 12.06,101.28 | 12.06,101.28 18.29,107.51 20.57,107.51 v21.21,106.87 | 4.57,90.74 7.75,90.74 14.96,83.53 | 12.06,101.28 16,97.35 | v87.25,71.69 87.25,107.89 | 19.05,43.75 17.78,43.75 17.45,43.42 17.45,43.37 16.69,42.61 9.77,42.61 8.76,43.62 8.76,48.07 | 19.18,43.75 27.69,35.24 34.54,35.24 34.54,46.17 35.31,46.93 | 59.31,109.03 59.31,107.51 | 87.12,108.02 v85.85,109.29
  Bottom 0.3: v134.24,45.15 v131.57,47.82 125.66,47.82 124.74,48.73 124.43,48.73 111.25,61.91 v90.93,61.91 v89.03,61.91 87.25,63.69 v87.25,71.69 | v21.21,106.87 21.46,107.13
  Bottom 0.305: v53.34,107.51 46.48,107.51 v46.1,107.13 21.46,107.13 | v85.85,109.29 v59.56,109.29
32KHZ
  Top 0.127: 90.17,60.39 90.17,59.12 90.3,58.99 U3.1 | R2_PINH1.1 95.89,59.38 95.89,59.63 96.52,60.26 96.52,61.03 93.57,63.98 90.48,63.98 90.28,63.78 90.28,60.5 90.17,60.39 | 90.17,60.39 89.15,60.39 88.9,60.65 32.38,60.65 29.21,57.47 26.8,57.47 17.91,48.58 17.91,48.33 U2.9
DN
  Top 0.127: J2.B7 164.08,53.41 161.29,53.41 157.35,49.47 156.34,49.47 D1.4
DP
  Top 0.127: J2.B6 164.21,55.06 164.72,55.06 165.86,56.2 165.86,57.34 165.1,58.1 163.58,58.1 163.19,58.49 162.94,58.49 158.5,54.04 158.5,53.02 158.24,52.77 157.23,52.77 156.34,51.88 156.34,51.37 D1.6
EPD_3V3  (via drill 0.3)
  Top 0.127: J1.16 81.28,14.93 81.53,14.93 J1.15 81.66,14.93 | 77.47,24.45 EPD_C5.1 | L1.2 80.14,29.23 | Q2.2 138.56,52.64 | 94.23,13.27 EPD_3V3.TP
  Top 0.3: v78.11,25.09 77.47,24.45 | 80.14,29.23 v80.14,27.12 80.11,27.15 72.84,27.15 71.85,26.16 C7.1 | 138.56,52.64 138.56,55.08 138.19,55.44 133.91,55.44 126.92,48.45 124.88,48.45 124.78,48.36 124.71,48.36 124.28,47.93 v124.28,47.79 | v88.65,18.86 94.23,13.27 | 81.66,14.93 81.66,16.85 81.65,16.86 81.65,18.09 v82.93,19.37
  Bottom 0.3: v88.65,18.86 83.44,18.86 v82.93,19.37 82.93,20.66 78.5,25.09 v78.11,25.09 v80.14,27.12 100.83,47.81 124.26,47.81 v124.28,47.79
EPD_3V3_C  (via drill 0.3)
  Top 0.127: 137.03,52.26 136.78,52.52 Q2.1 | 137.03,50.87 R_CL1.2 136.93,50.54 | 20.32,65.85 U2.18 | 20.32,69.28 EPD_3V3_C.TP
  Top 0.3: 137.03,52.26 137.03,50.87 | 20.32,69.28 20.32,66.87 | 20.32,66.87 20.32,65.85 | 20.32,66.87 v20.95,66.87 | v124.91,47.85 125.01,47.95 127.02,47.95 129.61,50.54 136.93,50.54
  Bottom 0.3: v20.95,66.87 28.19,59.63 112.83,59.63 124.15,48.31 124.48,48.31 124.77,48.01 124.77,47.98 124.85,47.91 124.86,47.91 v124.91,47.85
EPD_BUSY  (via drill 0.3)
  Top 0.127: v84.07,15.81 84.58,15.31 84.58,14.93 J1.9 | v17.02,63.57 12.19,63.57 10.29,65.47 10.29,65.72 U2.26 10.16,65.85 9.91,66.11 9.91,69.15 EPD_BUSY.TP
  Bottom 0.127: v17.02,63.57 18.16,64.71 21.84,64.71 22.23,64.33 22.23,64.07 21.97,63.82 21.97,62.95 35.2,49.72 36.07,49.72 62.38,23.41 76.4,23.41 83.11,16.7 83.19,16.7 v84.07,15.81
EPD_CS  (via drill 0.3)
  Top 0.127: v19.68,47.06 20.32,47.69 20.32,48.2 U2.11 | v14.22,45.02 13.21,44.01 EPD_CS.TP | v83.06,15.69 83.06,14.93 J1.12 | R9.1 43.43,36.26 43.94,35.75 45.34,35.75 46.35,34.74 v48.26,34.74 48.26,36.52 45.59,39.18 44.2,39.18 43.43,38.42 D10.1 43.31,38.42 v42.55,39.18
  Bottom 0.127: v14.22,45.02 16.26,47.06 v19.68,47.06 34.67,47.06 v42.55,39.18 | v83.06,15.69 82.8,15.69 82.68,15.56 67.44,15.56 v48.26,34.74
EPD_DC
  Top 0.127: U2.5 12.7,48.2 12.7,46.67 10.16,44.13 EPD_DC.TP
EPD_RST  (via drill 0.3)
  Top 0.127: J1.10 84.07,14.93 83.69,14.93 J1.11 83.57,14.93 v83.57,16.96 | v17.4,64.58 16.64,65.34 16.64,65.72 U2.21 16.64,65.85 17.14,66.36 17.14,69.28 EDP_RESE.TP
  Bottom 0.127: v83.57,16.96 83.21,16.96 76.5,23.67 62.88,23.67 36.58,49.98 35.31,49.98 22.23,63.06 22.23,63.69 22.48,63.95 22.48,64.45 21.97,64.96 17.78,64.96 v17.4,64.58
FLASH_CS
  Top 0.127: D9.1 35.31,50.74 33.53,50.74 R5.1 33.4,50.74 32.11,50.74 28.22,54.63 28.22,55.08 | U1.1 34.8,58.74 34.8,58.49 35.42,57.87 35.42,57.3 35.27,57.15 30.29,57.15 28.22,55.08 | 28.22,55.08 21.72,48.58 21.72,48.33 U2.12
GDR
  Top 0.127: J1.2 88.14,14.93 88.14,19.88 88.65,20.39 88.65,21.27 88.39,21.53 77.47,21.53 72.14,16.2 72.14,14.16 71.63,13.66 70.74,13.66 70.1,13.02 R4.2 69.98,13.02 69.09,13.91 67.44,13.91 66.67,13.15 Q3.1
GND  (via drill 0.3)
  Top 0.127: BOOT_BUTTON.1 22.35,108.14 25.65,108.14 BOOT_BUTTON.2 25.78,108.02 26.8,108.02 27.18,107.63 C6.2 27.3,107.51 37.97,96.84 46.86,96.84 IC1.3 46.99,96.84 v47.75,96.84 | CHANGE_BUTTON.1 47.37,108.14 50.67,108.14 CHANGE_BUTTON.2 50.8,108.02 52.07,108.02 52.45,107.63 C10.2 52.45,107.51 52.45,107 | 52.45,107 52.45,98.49 51.44,97.47 C_DELAY.2 51.31,97.35 50.8,96.84 v50.55,96.84 | 52.45,107 61.21,107 62.23,108.02 RESET_BUTTON.1 62.36,108.14 65.79,108.14 RESET_BUTTON.2 65.91,108.02 66.29,107.63 67.56,107.63 C5.2 67.69,107.63 67.94,107.89 76.96,107.89 TP4.TP 77.09,107.89 77.09,81.22 97.03,61.28 97.03,52.39 96.39,51.76 C10_SUPERCAP.1 96.39,51.63 96.39,51.12 97.28,50.23 | 12.7,93.66 C9.2 | 12.7,93.66 14.99,91.38 J4.G2 14.99,91.25 14.22,90.49 14.22,87.57 14.99,86.81 14.99,85.66 J4.G1 15.11,85.64 15.11,84.39 v14.96,84.24 | 4.45,93.03 4.06,93.41 3.94,93.41 1.91,95.44 1.91,95.7 J4.G4 | 4.45,93.03 0.89,89.47 0.89,82.74 J4.G3 | 4.45,93.03 J4.P6 4.57,92.9 5.84,92.9 6.6,93.66 12.7,93.66 | U2.28 7.75,65.72 7.75,61.15 12.06,56.84 U2.29_3 12.19,56.84 13.34,56.84 U2.29_6 13.46,56.84 14.61,56.84 U2.29_9 14.73,56.71 14.73,55.56 U2.29_8 14.73,55.44 14.73,55.06 | U1.9 38.61,56.84 36.83,55.06 34.8,55.06 U1.4 28.9,55.02 v28.71,54.83 | 14.73,55.06 14.73,54.3 U2.29_7 14.61,54.3 13.46,54.3 | 12.19,54.3 12.19,55.44 U2.29_2 | 13.46,54.3 13.46,55.44 U2.29_5 | 12.19,54.3 13.34,54.3 U2.29_4 13.46,54.3 | 12.19,54.3 U2.29_1 12.06,54.17 7.75,49.85 7.75,48.33 U2.1 | 14.73,55.06 v15.49,55.06 | 80.77,14.29 80.77,14.8 J1.17 | 80.77,14.29 80.9,14.16 84.84,14.16 | 84.84,14.16 85.09,14.42 85.09,14.8 J1.8
  Top 0.127: 84.84,14.16 86.61,12.38 89.53,12.38 J1.MP1 89.66,12.26 93.47,12.26 93.73,12 94.74,12 95.5,12.77 95.5,15.69 94.49,16.7 GND.TP 94.36,16.83 93.47,16.83 88.27,22.04 88.01,22.04 EPD_C1.2 87.88,22.16 86.61,22.16 EPD_C2.2 86.49,22.16 85.22,22.16 EPD_C6.2 85.09,22.16 83.82,22.16 EPD_C7.2 83.69,22.16 82.3,22.16 EPD_C8.2 82.17,22.16 80.9,22.16 EPD_C10.2 80.77,22.16 79.5,22.16 EPD_C11.2 79.38,22.29 78.11,22.29 EPD_C12.2 77.98,22.29 74.93,22.29 72.64,24.58 | SJ1.1 65.79,8.32 66.29,8.83 66.29,10.61 R2.1 66.42,10.73 67.06,11.37 67.94,11.37 68.33,10.99 68.33,9.85 68.45,9.72 69.6,9.72 71.88,12 71.88,12.38 | 71.88,12.38 76.07,12.38 J1.MP2 76.2,12.38 78.61,12.38 80.52,14.29 80.77,14.29 | 71.88,12.38 71.37,12.89 R4.1 | 72.64,24.58 72.52,24.7 71.88,24.7 C7.2 71.75,24.7 71.17,24.12 70.02,24.12 69.09,25.05 69.09,27.12 77.64,35.67 77.58,35.73 77.58,37.91 79.11,37.91 79.11,36.56 82.04,36.56 82.04,37.56 | 72.64,24.58 73.28,25.21 74.42,25.21 74.8,24.83 76.45,24.83 76.88,25.25 77.36,25.25 77.7,25.59 78.23,25.59 78.74,25.09 78.74,24.45 EPD_C5.2 | 131.06,54.04 128.78,51.76 128.4,51.76 R2_BAT.1 | 131.06,54.04 129.67,55.44 129.67,57.22 129.03,57.85 125.22,57.85 124.97,57.6 124.97,56.84 124.33,56.2 124.33,55.31 C1_BAT.2 124.21,55.18 124.21,53.53 120.9,50.23 119.63,50.23 | C2_BAT.2 133.48,59.88 132.59,59.88 130.18,57.47 130.18,56.84 130.68,56.33 130.94,56.33 MCP73831.2 131.06,56.2 131.29,56.2 131.85,55.64 131.85,54.83 131.06,54.04 | C8.2 87.25,45.91 87.25,48.96 86.61,49.6 U3.13 | 82.04,37.56 82.04,40.58 87.25,45.79 C8.2 | 82.04,37.56 D3.1 | 97.28,50.23 97.28,48.58 93.85,45.15 88.01,45.15 87.38,45.79 C8.2
  Top 0.127: 97.28,50.23 119.63,50.23 | C2.2 156.84,6.04 155.96,6.04 C1.2 155.19,6.67 155.19,7.81 156.21,8.83 157.48,8.83 157.73,9.08 | 157.73,9.08 157.73,9.21 157.48,9.46 SENSOR2.7 157.35,9.59 157.35,9.97 156.72,10.61 156.72,12.38 SENSOR2.1 156.72,12.51 156.72,12.77 161.8,17.85 163.58,17.85 | 157.73,9.08 157.99,8.83 158.5,8.83 159.13,9.46 SENSOR2.5 | 163.58,17.85 165.1,17.85 J3.1 | J2.B12 164.08,51.12 164.08,50.99 J2.A1 164.21,50.87 164.21,49.6 164.59,49.22 J2.MP3 | J2.MP3 164.72,49.22 168.53,49.22 J2.MP1 168.66,49.22 168.66,59.38 J2.MP2 168.53,59.38 164.72,59.38 J2.MP4 164.59,59.38 163.45,59.38 v163.07,58.99 157.86,53.79 157.86,53.53 R2-USB.2 | J2.B1 164.08,57.34 164.08,57.6 J2.A12 164.08,57.72 163.32,57.72 v163.07,57.98 | 163.58,41.25 163.58,48.07 164.59,49.09 J2.MP3 | 163.58,41.25 163.58,17.85 | EPD_C9.2 95.89,33.09 108.08,33.09 120.4,45.41 R1_PWRUSB.1 120.46,45.47 v121.32,44.6 | 123.44,42.48 125.48,44.52 125.48,45.15 | 123.44,42.48 C1_BAT1.2 | 125.48,45.15 124.84,45.79 IC4.2 | 125.48,45.15 126.75,45.15 127.51,45.91 132.08,45.91 C3.- 132.21,46.04 132.59,46.42 135.51,46.42 C1_BAT2.2 135.64,46.55 135.64,46.93 140.34,51.63 140.34,57.85 U4.4 140.46,57.98 140.84,57.98 141.35,58.49 | 141.35,58.49 141.48,58.61 U4.9 | U4.1 140.46,59.25 140.84,59.25 141.35,58.74 U4.9 | 141.35,58.49 142.37,58.49 U4.6 142.49,58.36 143.51,58.36 149.99,51.88 | 141.35,58.49 U4.9 | C5_USB.2 154.94,46.8 154.94,47.82 C4_USB.2 154.81,47.95 153.29,47.95 153.03,48.2 | 153.03,48.2 151.13,50.1 150.75,50.1 R2-USB1.1 150.62,50.23 149.99,50.87 149.99,51.88 | 149.99,51.88 150.11,52.01 151.26,52.01 151.38,51.88 151.38,51.5 152.4,50.48 153.67,50.48 D1.2
  Top 0.127: 123.44,42.48 v123.06,42.87 | 163.58,41.25 151.86,41.25 150.88,42.23 150.88,46.04 153.03,48.2 | v119.63,47.31 119.63,50.23
  Bottom 0.127: v50.55,96.84 v47.75,96.84 27.94,96.84 15.15,84.05 | v163.07,58.99 v163.07,57.98 | v123.06,42.87 v121.32,44.6 121.28,44.64 121.79,45.15 121.79,45.41 119.89,47.31 v119.63,47.31 | 15.15,84.05 15.11,84.01 15.11,55.44 v15.49,55.06 15.59,55.16 28.48,55.16 28.61,55.03 28.61,54.93 v28.71,54.83 | v14.96,84.24 15.15,84.05
  pour Top: 73.92,9.95 73.97,9.97 92.23,9.97 92.28,9.95 92.33,9.9 92.35,9.85 92.35,0.17 170.05,0.17 170.05,67.07 92.17,67.07 92.12,67.09 92.07,67.14 92.05,67.19 92.05,111.37 68.65,111.37 68.65,110.49 68.63,110.44 68.58,110.39 68.53,110.37 19.97,110.37 19.92,110.39 19.87,110.44 19.85,110.49 19.85,111.37 0.15,111.37 0.15,66.17 6.43,66.17 6.48,66.15 6.53,66.1 6.55,66.05 6.55,47.89 6.53,47.84 6.48,47.79 6.43,47.77 0.15,47.77 0.15,0.17 73.85,0.17 73.85,9.85 73.87,9.9
  pour Bottom: 6.53,47.84 6.48,47.79 6.43,47.77 0.15,47.77 0.15,0.17 73.85,0.17 73.85,9.85 73.87,9.9 73.92,9.95 73.97,9.97 92.23,9.97 92.28,9.95 92.33,9.9 92.35,9.85 92.35,0.17 170.05,0.17 170.05,67.07 92.17,67.07 92.12,67.09 92.07,67.14 92.05,67.19 92.05,111.37 68.65,111.37 68.65,110.39 68.63,110.34 68.58,110.29 68.53,110.27 19.97,110.27 19.92,110.29 19.87,110.34 19.85,110.39 19.85,111.37 0.15,111.37 0.15,66.17 6.43,66.17 6.48,66.15 6.53,66.1 6.55,66.05 6.55,47.89
GPIO8
  Top 0.127: R1.1 19.18,45.28 19.18,48.2 U2.10
I2C_PW  (via drill 0.3)
  Top 0.127: 155.96,7.31 C1.1 | 156.84,7.31 C2.1 156.97,7.31 | 157.99,7.31 R1_PINH.2 158.12,7.31 | 159.13,7.31 R2_PINH.2 | 157.48,12.51 SENSOR2.2 | 21.72,65.72 U2.17
  Top 0.3: 156.84,7.31 155.96,7.31 | 156.97,7.31 157.99,7.31 | 158.12,7.31 159.13,7.31 | SENSOR2.8 156.54,9.67 156.47,9.67 154.74,7.94 | 154.74,7.94 154.54,7.74 154.54,6.14 155.4,5.28 159.58,5.28 162.2,7.9 162.2,10.97 159.26,13.91 158.55,13.91 157.48,12.84 157.48,12.51 | 158.12,10.95 158.12,11.5 157.48,12.13 157.48,12.38 SENSOR2.2 | 158.12,10.95 158.12,9.59 SENSOR2.6 | v21.72,64.2 21.72,65.72 | v152.65,10.23 153.25,10.23 154.74,8.74 154.74,7.94 | R2_PINH.2 160,8.07 160,9.75 158.79,10.95 158.12,10.95
  Bottom 0.3: v21.72,64.2 21.32,63.8 21.32,63.1 46.99,37.43 46.99,34.57 71.32,10.25 92.63,10.25 92.63,10.23 v152.65,10.23
INT_RTC
  Top 0.127: INT_RTC.TP 16.26,44.01 16.51,44.26 16.51,48.2 U2.8 16.64,48.33 16.64,48.58 25.78,57.72 29.08,57.72 32.38,61.03 89.41,61.03 R1_PINH1.1 89.81,61.39 89.81,64.09 89.97,64.25 93.68,64.25 96.77,61.15 96.77,53.79 94.61,51.63 94.61,50.1 94.49,49.98 93.47,49.98 87.88,55.56 87.88,58.87 U3.3
IO/BOOT
  Top 0.127: C6.1 27.18,109.03 26.29,109.03 25.78,109.54 BOOT_BUTTON.3 25.65,109.67 22.35,109.67 BOOT_BUTTON.4 22.23,109.54 21.72,109.03 21.34,109.03 | 21.34,109.03 20.7,109.03 R_BOOT.2 | 21.34,109.03 21.34,107.38 24.13,104.59 24.13,65.85 U2.15
IO/CHANGE
  Top 0.127: C10.1 52.45,109.03 51.31,109.03 50.8,109.54 CHANGE_BUTTON.3 50.67,109.67 47.37,109.67 CHANGE_BUTTON.4 47.24,109.54 46.74,109.03 46.35,109.03 | 46.35,109.03 45.34,109.03 R_CHANGE.2 | 46.35,109.03 46.35,107.51 48.26,105.6 48.26,86.68 23.75,62.17 20.83,62.17 18.92,64.07 15.49,64.07 14.1,65.47 14.1,65.72 U2.23
MISO  (via drill 0.3)
  Top 0.127: v29.97,57.6 34.67,57.6 U1.2 | v28.83,58.74 19.3,58.74 14.73,63.31 11.18,63.31 9.02,65.47 9.02,65.72 U2.27 8.89,65.85 8.89,66.11 8.26,66.74 6.99,66.74 | R8.1 71.37,14.54 69.98,14.54 D12.1 69.85,14.42 37.48,14.42 6.99,44.91 6.99,66.74 | 6.99,66.74 6.99,68.9 7.24,69.15 MISO.TP 7.24,69.28 v5.71,70.8 | v5.71,93.41 5.08,94.05 4.7,94.05 J4.P7
  Bottom 0.127: v28.83,58.74 v29.97,57.6 | v5.71,70.8 v5.71,93.41
MOSI  (via drill 0.3)
  Top 0.127: v84.2,18.35 82.04,16.2 82.04,14.93 J1.14 | v92.84,18.35 94.36,19.88 MOSI.TP | 6.86,100.78 8.26,100.78 D6.1 | 5.71,89.73 4.7,89.73 J4.P3 | v6.22,90.24 5.71,89.73 | 6.86,100.78 v6.22,100.14 | 6.86,100.78 R7.1 | v41.4,55.06 42.55,55.06 U1.5 42.55,54.93 43.81,53.66 v43.81,49.72 | v28.45,58.23 25.02,58.23 15.37,48.58 15.37,48.33 U2.7 | v20.45,75 5.71,89.73
  Bottom 0.127: v92.84,18.35 v84.2,18.35 83.19,18.35 51.82,49.72 v43.81,49.72 | v6.22,100.14 v6.22,90.24 | v41.4,55.06 31.62,55.06 v28.45,58.23 28.32,58.36 28.32,58.99 22.1,65.22 21.97,65.22 19.15,68.04 19.15,73.7 v20.45,75
N$3
  Top 0.127: 124.08,44.9 122.97,44.9 D2.1 122.05,45.16 122.05,42.36 121.67,41.98 C1_BAT1.1 121.54,41.85 112.14,32.45 95.38,32.45 95.12,32.2 95.12,29.66 94.65,29.18 89.84,29.18 84.15,23.49 77.29,23.49 76.33,24.45 73.91,24.45 Q1.2 | 124.08,44.9 124.71,44.9 IC4.3 | 124.08,44.9 124.08,46.17 124.21,46.29 124.33,46.29 IC4.1
N$4
  Top 0.127: C4.1 70.48,24.7 69.85,24.7 69.34,25.21 69.34,26.59 78.34,35.59 D3.2 78.61,34.99 79.12,34.48 88.14,34.48 91.19,31.43 93.22,31.43 D4.1
N$5
  Top 0.127: R2-USB.1 157.86,52.26 159.77,52.26 163.45,55.95 164.08,55.95 J2.B5
N$6
  Top 0.127: R2-USB1.2 150.75,51.37 152.27,49.85 152.27,49.34 152.65,48.96 159.51,48.96 163.58,53.02 164.08,53.02 J2.A5
N$9
  Top 0.127: CHG_LED.C 124.08,57.09 122.81,57.09 122.05,56.33 121.16,56.33 120.52,56.96 R1-BAT.1
N$10
  Top 0.127: R1-BAT.2 121.79,57.09 122.43,57.09 123.44,58.1 129.16,58.1 129.92,57.34 129.92,56.2 130.94,55.18 MCP73831.1
N$11
  Top 0.127: J1.24 77.22,14.93 77.22,20.13 77.98,20.89 EPD_C12.1
N$12
  Top 0.127: R2_BAT.2 128.4,53.15 128.4,55.18 MCP73831.5
N$13
  Top 0.127: IC1.5 49.78,98.74 51.31,98.74 C_DELAY.1
N$14
  Top 0.127: D7.1 91.44,62.68 91.44,53.02 93.85,50.61 R_CAPACITOR.1
N$15
  Top 0.127: J1.22 78.23,14.93 78.23,17.97 80.77,20.51 80.77,20.89 EPD_C10.1
N$17
  Top 0.127: J1.20 79.25,14.93 79.25,17.85 82.17,20.77 EPD_C8.1
N$18
  Top 0.127: J1.19 79.76,14.93 79.76,16.83 83.69,20.77 EPD_C7.1
N$19  (via drill 0.3)
  Top 0.127: v81.15,16.58 80.26,15.69 80.26,14.93 J1.18 | EPD_C6.1 85.09,20.77 82.17,17.85 82.17,17.08 v82.15,17.07
  Bottom 0.127: v81.15,16.58 81.66,16.58 v82.15,17.07
N$21
  Top 0.127: J1.5 86.61,14.93 86.61,20.77 EPD_C2.1
N$22
  Top 0.127: J1.4 87.25,14.93 87.25,20.13 87.88,20.77 EPD_C1.1
N$23  (via drill 0.3)
  Top 0.127: v40.01,45.15 40.01,40.07 D8.2 40.13,39.94 43.31,39.94 D10.2 43.43,39.94 44.96,39.94 D11.2 45.09,39.82 45.34,39.82 69.09,16.07 69.85,16.07 D12.2 | v9.14,94.17 9.14,101.41 8.38,102.17 D6.2 | v32.77,50.1 34.67,50.1 35.31,49.47 D9.2 35.43,49.34 35.81,49.34 v36.16,49
  Bottom 0.127: v9.14,94.17 9.14,85.16 14.86,79.44 14.86,55.06 19.81,50.1 v32.77,50.1 | v36.16,49 v40.01,45.15
PREVGL  (via drill 0.3)
  Top 0.127: 78.61,14.42 78.36,14.16 77.98,14.16 77.72,14.42 77.72,14.8 J1.23 77.72,14.93 77.72,17.85 79.38,19.5 79.38,20.89 EPD_C11.1 | 78.61,14.42 78.61,14.8 J1.21 78.61,14.42 | v89.92,30.16 89.92,31.31 D4.2 | 89.92,28.01 D5.1 | v78.99,14.04 78.61,14.42 | EPD_C9.1 95.82,29.86 94.44,28.48 90.39,28.48 89.92,28.01 | 89.92,28.01 89.92,28.67 v89.97,28.72
  Bottom 0.127: v78.99,14.04 89.15,14.04 93.34,18.23 93.34,18.48 86.11,25.72 85.98,25.72 85.6,26.1 85.6,26.36 85.85,26.61 85.97,26.61 | 85.97,26.61 85.73,26.36 85.73,26.02 85.97,25.77 86.32,25.77 89.26,28.72 v89.97,28.72 | v89.92,30.16 89.62,29.87 89.23,29.87 86.07,26.7 85.97,26.61
RESE  (via drill 0.3)
  Top 0.127: v86.49,13.27 87.63,14.42 87.63,14.8 J1.3 | 69.85,11.12 69.09,10.35 R3.2 | 69.85,11.12 v70.87,12.13 | 69.85,11.12 67.94,13.02 Q3.2
  Bottom 0.127: v86.49,13.27 72.01,13.27 v70.87,12.13
RESE'
  Top 0.127: 67.94,8.96 68.96,8.96 R3.1 | 67.94,8.96 67.31,8.32 SJ1.2 | 67.94,8.96 67.69,9.21 67.69,10.61 R2.2
RESET  (via drill 0.3)
  Top 0.127: C5.1 67.56,109.03 66.42,109.03 65.91,109.54 RESET_BUTTON.3 65.79,109.67 62.36,109.67 RESET_BUTTON.4 62.23,109.54 61.09,109.54 60.58,109.03 R_RESET.2 60.45,108.9 v59.82,108.27 | v47.75,98.74 46.99,98.74 IC1.1 | v16,61.41 16,54.42 10.29,48.71 10.29,48.33 U2.3
  Bottom 0.127: 50.29,98.74 v47.75,98.74 | v59.82,108.27 50.29,98.74 | v16,61.41 16,71.19 41.15,96.33 50.67,96.33 51.05,96.71 51.05,97.98 50.29,98.74
RTC_RST  (via drill 0.3)
  Top 0.127: v85.85,60.14 85.85,59.63 86.49,58.99 U3.4 | U2.16 22.99,65.72 22.99,65.51 24.64,63.86 v24.68,63.86
  Bottom 0.127: v85.85,60.14 82.17,63.82 24.71,63.82 v24.68,63.86
RX
  Top 0.127: U2.24 12.83,65.85 12.83,67.25 14.73,69.15 RX.TP
SCK  (via drill 0.3)
  Top 0.127: v82.55,16.07 82.55,14.93 J1.13 | v47.5,35.5 46.86,35.5 45.34,37.02 40.51,37.02 | 40.51,37.02 40.01,36.52 R6.1 | 39.37,45.15 39.88,45.66 40.34,45.66 44.24,49.55 44.24,54.51 42.55,56.2 U1.6 | 39.37,45.15 39.37,39.18 40.01,38.55 D8.1 40.13,38.42 40.51,38.04 40.51,37.02 | v16,46.04 14.1,47.95 14.1,48.2 U2.6 | v9.4,70.55 3.43,76.52 3.43,91.12 4.06,91.76 4.57,91.76 J4.P5 4.7,91.89 5.21,91.89 6.48,93.16 v6.73,93.16 | v78.36,108.02 82.17,108.02 SCK.TP | 39.37,45.15 38.52,46 v35.09,46
  Bottom 0.127: v82.55,16.07 67.56,16.07 48.13,35.5 v47.5,35.5 | v9.4,70.55 9.4,49.22 14.1,44.52 14.48,44.52 v16,46.04 35.05,46.04 v35.09,46 | v78.36,108.02 60.71,108.02 59.94,108.78 22.35,108.78 v6.73,93.16
SCL  (via drill 0.3)
  Top 0.127: R2_PINH.1 159.26,6.04 159.64,6.42 159.66,6.42 161.33,8.1 161.33,10.18 159.04,12.48 SENSOR2.4 159.09,12.54 v159.09,13.36 | v165.1,39.18 165.1,21.02 J3.4 | U4.7 142.49,58.87 147.45,58.87 154.56,51.76 154.56,49.72 154.78,49.51 v154.78,49.43 | v23.62,62.68 20.7,62.68 17.91,65.47 17.91,65.72 U2.20 | v87.88,52.39 90.3,49.98 90.3,49.72 U3.16 | v123.61,50.27 123.57,50.23 121.54,50.23 v121.53,50.22
  Bottom 0.127: 154.81,49.47 v165.1,39.18 159.13,33.21 159.13,13.4 v159.09,13.36 | v23.62,62.68 23.62,62.42 33.66,52.39 v87.88,52.39 97.92,52.39 100.18,50.13 121.44,50.13 v121.53,50.22 | 154.81,49.47 153.42,49.47 152.75,50.13 123.75,50.13 v123.61,50.27 | 154.81,49.47 v154.78,49.43
SDA  (via drill 0.3)
  Top 0.127: R1_PINH.1 158.12,6.04 158.5,6.42 158.5,6.54 158.62,6.67 159.55,6.67 160.78,7.9 160.78,9.72 v158.88,11.62 158.12,12.38 SENSOR2.3 | 150.24,62.42 168.02,62.42 169.8,60.65 169.8,25.09 166.12,21.4 166.12,20.51 165.61,20 165.23,20 J3.3 165.1,19.88 164.85,19.88 v164.08,19.12 | 150.24,62.42 148.59,62.42 145.54,59.38 142.49,59.38 U4.8 | v22.73,63.19 21.46,63.19 19.18,65.47 19.18,65.72 U2.19 | v87.12,50.87 88.14,50.87 89.03,49.98 89.03,49.72 U3.15 | 150.24,62.42 150.24,65.09 149.48,65.85 112.27,65.85 v97.54,51.12
  Bottom 0.127: v158.88,11.62 158.88,12.51 164.08,17.72 v164.08,19.12 | v22.73,63.19 22.73,62.93 35.43,50.23 86.49,50.23 v87.12,50.87 87.38,51.12 v97.54,51.12
SRC  (via drill 0.3)
  Top 0.127: L1.1 79.53,32.7 77.31,32.7 70.57,25.96 C4.2 70.48,25.97 v69.85,25.34 | Q3.3 67.31,15.18 70.36,15.18 70.53,15.35 70.53,22.02 v68.47,24.09 | D5.2 93.22,27.88 91.19,27.88 86.49,23.18 77.83,23.18 v77.72,23.07
  Bottom 0.127: v68.47,24.09 69.72,25.34 v69.85,25.34 75.46,25.34 v77.72,23.07
SS_SD  (via drill 0.3)
  Top 0.127: R10.1 44.96,36.39 45.59,36.39 46.99,34.99 47.62,34.99 48.01,35.37 48.01,35.63 45.34,38.29 45.09,38.29 D11.1 44.96,38.42 44.83,38.55 v44.2,38.55 | v11.56,46.42 11.56,48.2 U2.4 | v8.89,84.77 5.21,88.46 J4.P2
  Bottom 0.127: v44.2,38.55 19.68,38.55 11.81,46.42 v11.56,46.42 8.89,49.09 v8.89,84.77
TX
  Top 0.127: U2.25 11.56,65.85 11.56,68.52 12.19,69.15 TX.TP
USB_D+  (via drill 0.3)
  Top 0.127: v152.15,51.37 153.67,51.37 D1.1 | v98.17,51.12 98.93,51.88 121.92,51.88 v121.96,51.92 | U2.14 24.36,48.11 36.46,48.11 39.6,51.25 40.39,51.25 v40.54,51.4
  Bottom 0.127: v98.17,51.12 97.66,51.63 41.07,51.63 40.84,51.4 v40.54,51.4 | v121.96,51.92 122.5,51.37 v152.15,51.37
USB_D-  (via drill 0.3)
  Top 0.127: v152.78,49.47 153.67,49.47 D1.3 | U2.13 22.99,48.2 22.99,47.95 23.63,47.3 36.01,47.3 39.42,50.71 v39.65,50.71 | v120.14,49.71 120.15,49.72 124.21,49.72 v124.22,49.71
  Bottom 0.127: v39.65,50.71 39.65,51.1 40.44,51.88 98.04,51.88 100.2,49.72 120.13,49.72 v120.14,49.71 | v152.78,49.47 124.41,49.47 124.22,49.66 v124.22,49.71
VBAT  (via drill 0.3)
  Top 0.127: U4.2 140.46,58.87 140.46,58.49 U4.3 140.34,58.49 140.33,58.49 140.33,58.53 | 131.44,57.09 131.06,57.09 MCP73831.3 | 76.07,25.59 Q1.3 | 133.48,58.61 C2_BAT.1 133.6,58.61 133.73,58.49 | 148.84,64.45 VBAT.TP | 85.87,26.14 85.91,26.19 | 123.15,46.52 123.05,46.42
  Top 0.3: 76.07,25.59 77.22,25.59 77.76,26.14 85.87,26.14 | 131.44,57.09 131.7,56.84 | 131.7,56.84 133.48,58.61 | 133.73,58.49 140.33,58.49 | 148.84,64.45 144.55,64.45 139.78,59.69 139.78,59.08 140.33,58.53 | 85.91,26.19 v86.14,26.19 | v121.28,45.28 121.58,45.58 121.58,45.85 121.75,46.02 122.65,46.02 123.05,46.42 | 131.7,56.84 131.74,56.79 131.78,56.79 132.21,56.36 132.21,54.38 128.87,51.03 126.85,51.03 124.6,48.78 124.53,48.78 123.15,47.4 123.15,46.52
  Bottom 0.3: v121.28,45.28 105.53,29.53 89.48,29.53 v86.14,26.19
VBUS  (via drill 0.3)
  Top 0.127: 156.21,46.8 C5_USB.1 156.34,46.67 | 156.21,47.82 C4_USB.1 156.34,47.95 | 156.34,44.26 PFMF.050.1.2 | VBUS.TP 149.1,61.15 154.81,55.44 154.81,51.5 155.83,50.48 156.21,50.48 D1.5 156.34,50.36 156.72,49.98 v157.23,49.98 | v156.97,48.45 156.84,48.45 | 125.73,57.09 CHG_LED.A 125.73,57.22 | 125.73,55.31 C1_BAT.1 | 128.4,57.22 MCP73831.4 | 73.91,26.48 Q1.1 | 120.4,46.67 R1_PWRUSB.2 120.52,46.8 120.65,46.93 | v125.6,50.74 125.6,50.48 | 122.64,47.52 D2.2
  Top 0.3: 156.21,47.82 156.21,46.8 | 156.34,44.26 156.34,46.67 | 156.84,48.45 156.34,47.95 | 125.73,55.31 125.73,57.09 | 125.73,57.22 128.4,57.22 | 120.4,46.67 108.25,46.67 94.5,32.93 94.5,30.53 93.63,29.66 88.78,29.66 85.69,26.57 77.59,26.57 77.5,26.48 73.91,26.48 | 120.65,46.93 122.02,46.93 D2.2 | v125.6,50.74 C1_BAT.1 | 122.64,47.52 124.33,49.21 124.43,49.21 125.6,50.39 125.6,50.48
  Bottom 0.127: v157.23,49.98 156.97,49.72
  Bottom 0.3: v156.97,48.45 156.97,49.72 155.19,49.72 154.18,50.74 v125.6,50.74
VRTC
  Top 0.127: C8.1 88.65,45.91 90.55,45.91 93.85,49.22 R_CAPACITOR.2 93.98,49.34 96.27,49.34 C10_SUPERCAP.2
  Top 0.152: U3.14 88.56,48.87 88.56,48.58 88.65,48.49 88.65,45.91
VUSB  (via drill 0.3)
  Top 0.127: 164.08,56.71 164.08,56.58 | PFMF.050.1.1 151.89,44.13 | 164.23,56.65 J2.B4 | J2.B9 164.08,52.01 164.08,51.76 J2.A4 164.04,51.67
  Top 0.3: 164.08,56.58 J2.B4 | 164.08,56.71 J2.A9 | 151.89,44.13 154.42,41.6 156.93,41.6 157.85,42.52 157.85,46.67 162.85,51.67 164.04,51.67 | v165.1,52.52 165.1,52.32 164.82,52.04 J2.B9 | v165.1,56.07 165.1,56.15 164.6,56.65 164.23,56.65
  Bottom 0.3: v165.1,52.52 v165.1,56.07